# Altium PCB STC12C5A60S2.PcbDoc
Units mil, origin at the board's own origin, x right, y up, seen from the top; angles counter-clockwise.
Board outline 3950.03 x 3947.04 mil, 2 copper layers (Top Layer, Bottom Layer); 107 components, 96 nets, 396 pads, 0 vias.
Unrouted connection lines stored in the file: 234.
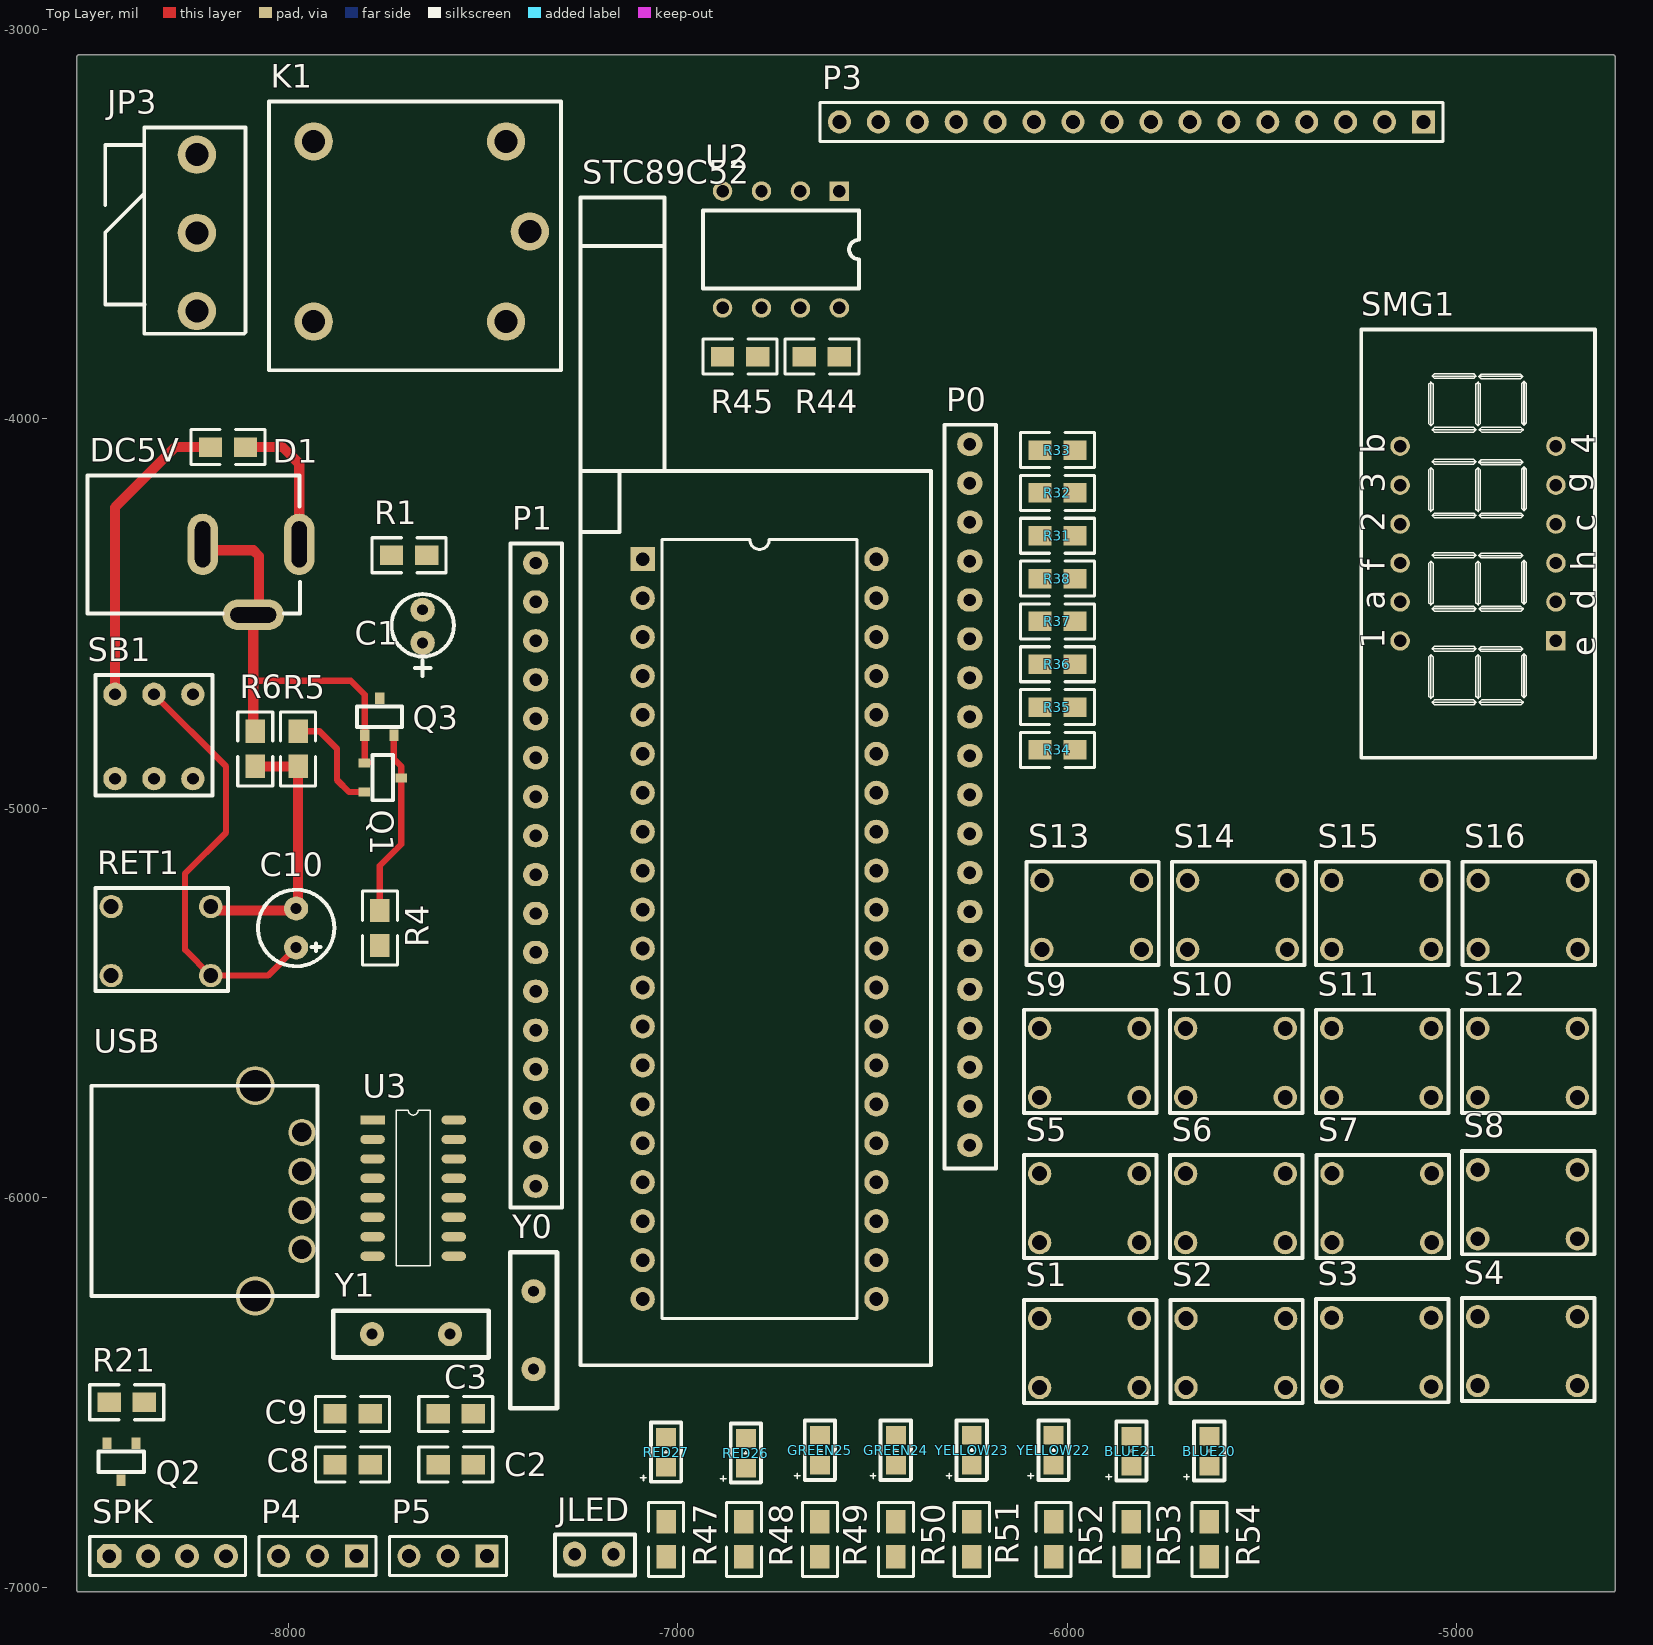
[diagram p0: Top Layer view]
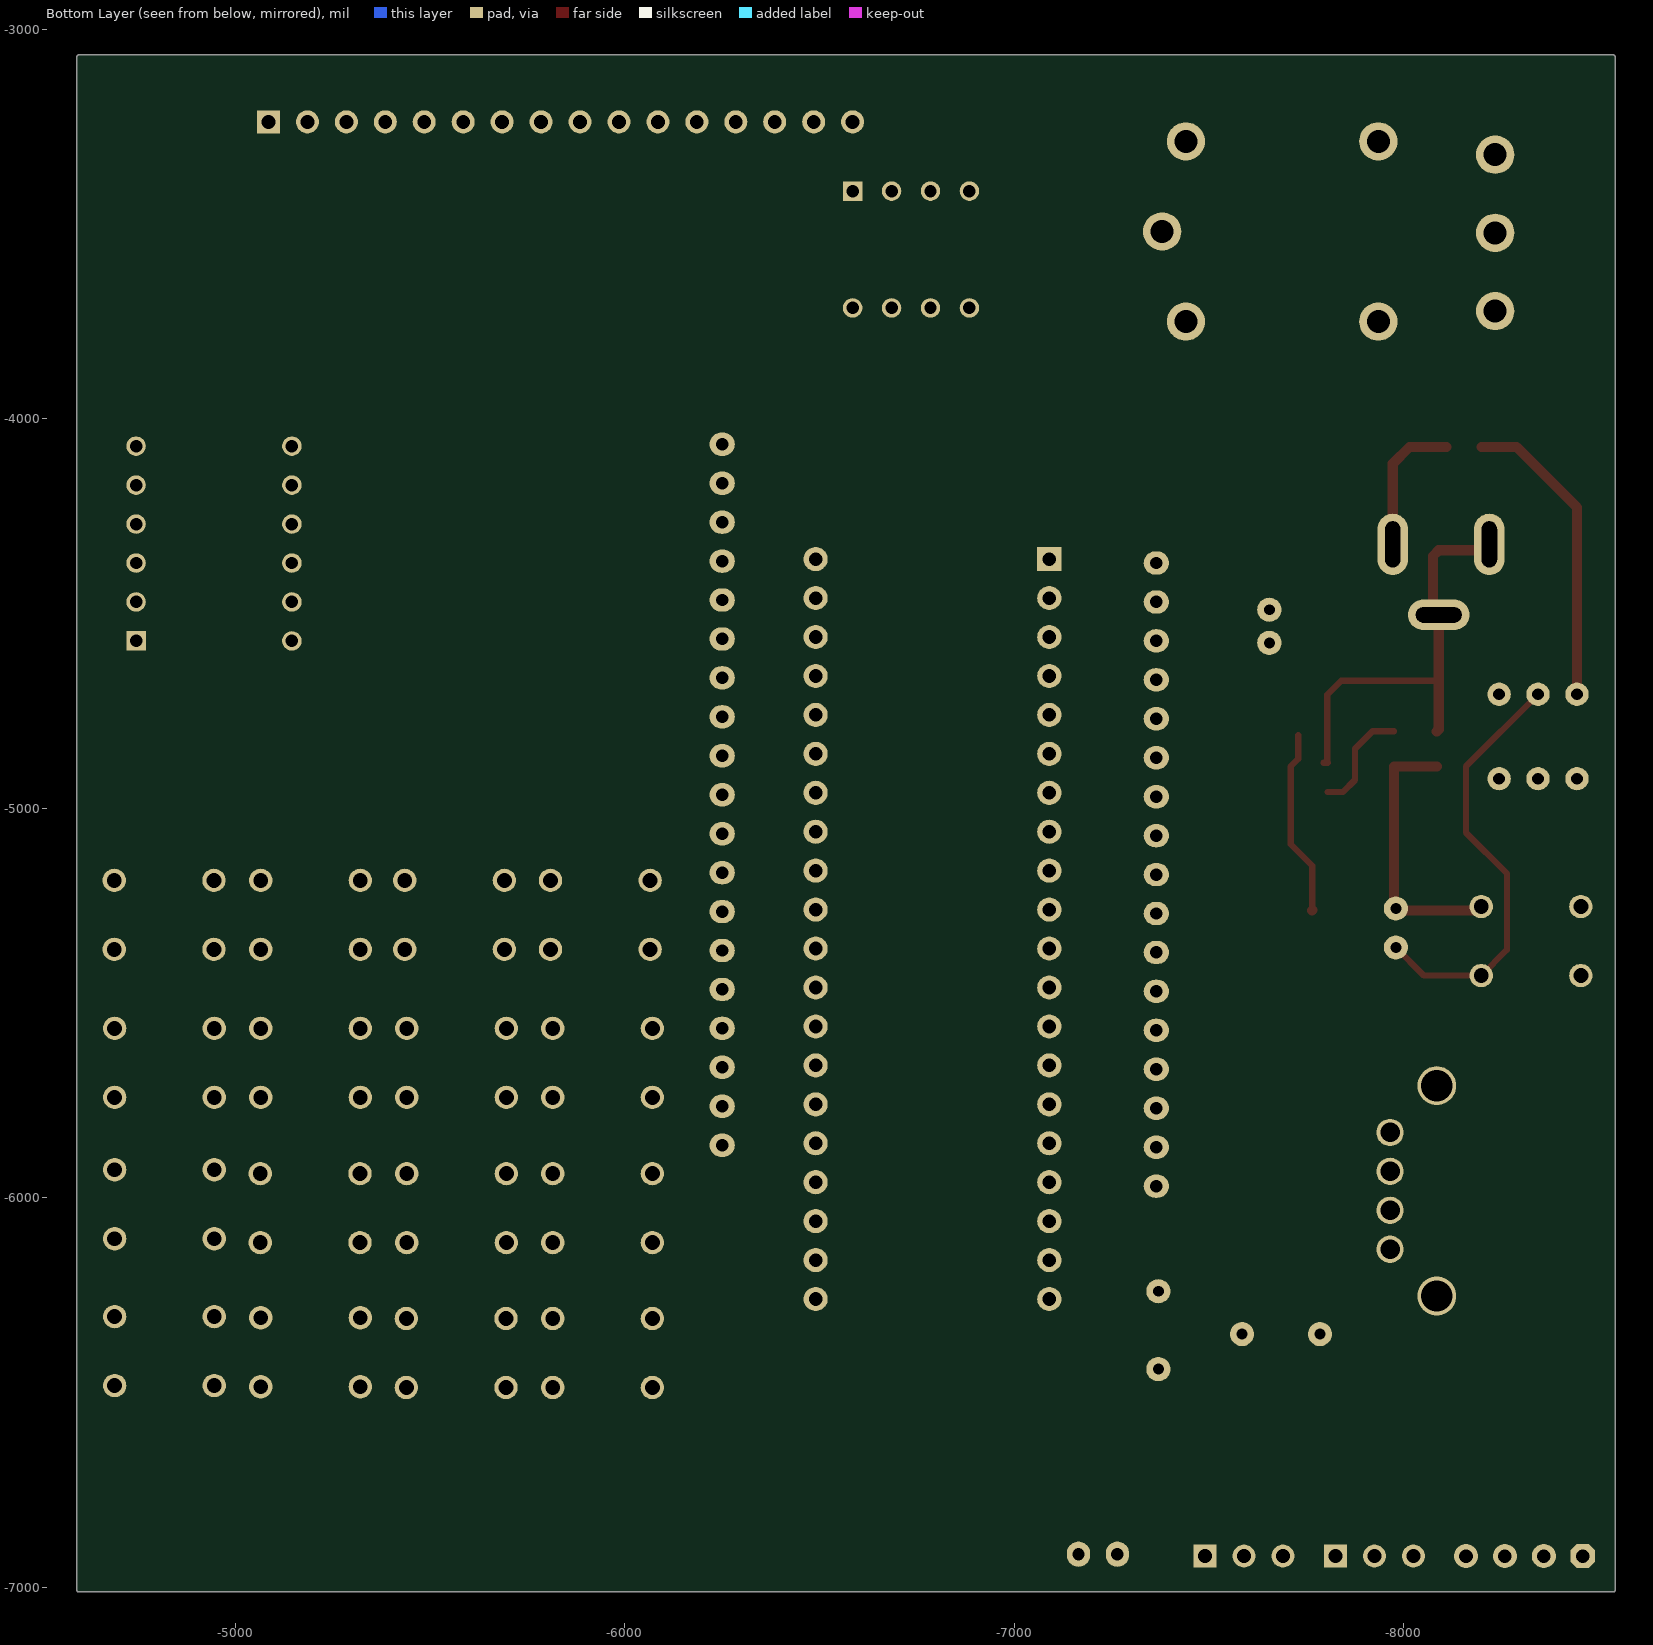
[diagram p1: Bottom Layer view, seen from below]

## Layer stack, top to bottom
Top Solder: solder mask 0.4, Solder Resist, Dk 3.5
Top Layer: signal copper 1.4
Dielectric 1: dielectric 12.6, FR-4, Dk 4.8
Bottom Layer: signal copper 1.4
Bottom Solder: solder mask 0.4, Solder Resist, Dk 3.5

## Board outline
-8543.01,-7007.17 -8543.01,-3070.16 cw(c-8537.99,-3070.16) -8537.99,-3065.14 -4597.99,-3065.14 cw(c-4597.99,-3070.16) -4592.98,-3070.16 -4592.98,-7007.17 cw(c-4597.99,-7007.17) -4597.99,-7012.18 -8535,-7012.18 cw(c-8535,-7007.17) -8536.5,-7011.95 cw(c-8537.99,-7007.17)

## Design rules (kind name [scope] priority, off if disabled: settings)
Clearance [All] p1: gap=10 ignorepadtopadclearanceinfootprint=FALSE except(0: Arc-Hole Track-Hole SMDPad-Hole THPad-Hole Via-Hole Fill-Hole Poly-Hole Region-Hole Text-Hole)
PolygonConnect [All] p1: connectstyle=Relief reliefconductorwidth=10 reliefentries=4 polygonreliefangle="90 Angle" airgapwidth=10
RoutingVias [All] p1: holewidth=28 width=50 viastyle="Through Hole" minholewidth=28 minwidth=50 maxholewidth=28 maxwidth=50
SolderMaskExpansion [All] p1: expansion=4
Width [All] p1: maxlimit=26 minlimit=10 preferedwidth=16
30 further rules are at their usual default settings.

## Components (designator, comment, footprint, x,y, rotation, side; value= is the part's Value field where it differs from the comment)
BLUE20 "LED0" led-0805 -5635,-6689.33 r90 top
BLUE21 "LED0" led-0805 -5835,-6689.33 r90 top
C1 "10u" C2 -7655,-4575 r90 top
C2 "Cap" 0805R -7615,-6685 r0 top value=0.1uF
C3 "Cap" 0805R -7615,-6555 r0 top value=0.1uF
C4 "100uf" c4 -6570,-1002.17 r0 top
C5 "104" 0805R -6745,-1042.17 r90 top
C6 "Cap" 0805R -8835,-332.17 r90 top value=104
C7 "104" 0805R -2440,-4712.17 r90 top
C8 "22P" 0805R -7790,-6685 r180 top
C9 "22p" 0805R -7790,-6555 r180 top
C10 "10uF" c4 -7980,-5357.17 r90 top
D1 "1N5918" 0805R -8110,-4072.17 r180 top
D4 "4148" 0805R -8070,-1042.17 r90 top
D42 "LED0" led-0805 -8310,-967.17 r0 top
DC5V "POWER" DC5V-3 -7971.97,-4322.17 r270 top
GREEN24 "LED0" led-0805 -6440,-6687.17 r90 top
GREEN25 "LED0" led-0805 -6635,-6687.17 r90 top
JLED "JJ" j2 -7265,-6915 r90 top
JP3 "JP3" JP3 -8235,-3321.38 r270 top
JPW "JPW" SIP -6260,-1082.17 r90 top
JSM "JJ" j2 -4855,-242.17 r0 top
K1 "JDQ" JDQ-2 -8042.88,-3870.7 r0 top
P0 "P2" j19 -6250,-4065 r0 top
P1 "Header 17" j17 -7365,-4370 r0 top
P3 "Header 16" HDR1X16 -5085,-3237.17 r180 top
P4 "DS18B20" HDR1X3#1 -7825,-6920 r180 top
P5 "H1838" HDR1X3#1 -7490,-6920 r180 top
P6 "SW/JDQ" HDR1X3#1 -2290,-3202.17 r90 top
P7 "SW/SPK" HDR1X3#1 -3150,-4417.17 r90 top
Q1 "S8050" "SOT-23 S8050" -7784,-4863.17 r270 top
Q2 "S8550" "SOT-23 S8050" -8371,-6651 r180 top
Q3 "8050" "SOT-23 S8050" -7824,-4791.17 r0 top
Q4 "S8550" "SOT-23 S8050" -3070,-3042.17 r0 top
Q5 "S8050" "SOT-23 S8050" -2660,-4662.17 r0 top
Q10 "S8550" "SOT-23 S8050" -6170,-282.17 r0 top
Q11 "S8550" "SOT-23 S8050" -5950,-282.17 r0 top
Q12 "S8550" "SOT-23 S8050" -5750,-282.17 r0 top
Q13 "S8550" "SOT-23 S8050" -5530,-282.17 r0 top
R1 "10K" 0805R -7735,-4350 r0 top
R2 "1K" 0805R -3810,-3752.17 r90 top
R4 "1K" 0805R -7765,-5262.17 r270 top
R5 "1K" 0805R -7975,-4892.17 r90 top
R6 "10K" 0805R -8085,-4892.17 r90 top
R7 "Res1" 0805R -4005,-6447.17 r90 top value=10K
R8 "Res1" 0805R -4175,-6447.17 r90 top value=10K
R9 "Res1" 0805R -2290,-3872.17 r90 top value=10K
R10 "5.1K" 0805R -9545,-1042.17 r90 top
R11 "5.1K" 0805R -9325,-1042.17 r90 top
R12 "5.1K" 0805R -9125,-1042.17 r90 top
R13 "5.1K" 0805R -8905,-1042.17 r90 top
R21 "5.1K" 0805R -8370,-6525 r180 top
R31 "1K" 0805R -6070,-4300 r0 top
R32 "1K" 0805R -6070,-4190 r0 top
R33 "1K" 0805R -6070,-4080 r0 top
R34 "1K" 0805R -6070,-4850 r0 top
R35 "1K" 0805R -6070,-4740 r0 top
R36 "1K" 0805R -6070,-4630 r0 top
R37 "1K" 0805R -6070,-4520 r0 top
R38 "1K" 0805R -6070,-4410 r0 top
R41 "5.1K" 0805R -2845,-3092.17 r90 top
R42 "1K" 0805R -4120,-3092.17 r90 top
R43 "5.1k" 0805R -8490,-332.17 r90 top
R44 "5.1K" 0805R -6675,-3840 r0 top
R45 "5.1K" 0805R -6885,-3840 r0 top
R46 "100" 0805R -3890,-3092.17 r90 top
R47 "102" 0805R -7030,-6922.17 r90 top
R48 "102" 0805R -6830,-6922.17 r90 top
R49 "103" 0805R -6635,-6922.17 r90 top
R50 "103" 0805R -6440,-6922.17 r90 top
R51 "102" 0805R -6245,-6922.17 r90 top
R52 "102" 0805R -6035,-6922.17 r90 top
R53 "472" 0805R -5835,-6922.17 r90 top
R54 "472" 0805R -5635,-6922.17 r90 top (schematic designator 54)
red "LED0" led-0805 -3260,-3017.17 r0 top
RED26 "LED0" led-0805 -6825,-6694.33 r90 top
RED27 "LED0" led-0805 -7030,-6692.17 r90 top
RET1 "RET" SW-5.4 -8455,-5429.33 r0 top
RW1 "Res Tap" RW -7945,-907.17 r0 top value=10K
S1 "RET" SW-5.4 -6070.9,-6487.17 r0 top
S2 "RET" SW-5.4 -5695,-6487.17 r0 top
S3 "RET" SW-5.4 -5320.9,-6485 r0 top
S4 "RET" SW-5.4 -4945.9,-6482.17 r0 top
S5 "RET" SW-5.4 -6070.9,-6115 r0 top
S6 "RET" SW-5.4 -5695.9,-6115 r0 top
S7 "SW-PB" SW-5.4 -5320,-6115 r0 top
S8 "SW-PB" SW-5.4 -4945.9,-6105 r0 top
S9 "SW-PB" SW-5.4 -6070.9,-5742.17 r0 top
S10 "SW-PB" SW-5.4 -5695.9,-5742.17 r0 top
S11 "SW-PB" SW-5.4 -5320.9,-5742.17 r0 top
S12 "SW-PB" SW-5.4 -4945.9,-5742.17 r0 top
S13 "SW-PB" SW-5.4 -6065,-5362.17 r0 top
S14 "SW-PB" SW-5.4 -5690.9,-5362.17 r0 top
S15 "SW-PB" SW-5.4 -5320.9,-5362.17 r0 top
S16 "SW-PB" SW-5.4 -4945,-5362.17 r0 top
SB1 "RET" SW6 -8445,-4707.17 r0 top
SMG1 "SMG" smg -4975,-4335 r90 top
SPK "Speaker" HDR1X4 -8460,-6920 r0 top
STC89C52 "U1" Stc89c52 -7090,-4360 r0 top
U1 "3144E" HDR1X3#2 -9770,-2032.17 r90 top
U2 "24C04" DIP8 -6585,-3415 r270 top
U3 "CH340G-16" "SOP-16 - duplicate" -7783.66,-5800 r0 top
USB "CON4" USB -7965,-5832.17 r90 top
Y0 "11.0592" XTAL1 -7370,-6440 r90 top
Y1 "12MHz" XTAL1 -7585,-6350 r180 top
YELLOW22 "LED0" led-0805 -6035,-6687.17 r90 top
YELLOW23 "LED0" led-0805 -6245,-6687.17 r90 top

## Footprints (in the part's own frame and the unit in brackets; to place one, negate y for a bottom-side part, rotate by r counter-clockwise, add the part's x,y. Pads: shape width x height; smd on the part's side, far side on the other; paste and mask are expansions set on the pad)
0805R [mil]
  rect 60x50 smd: 1(0,0) 2(90,0)
  silkscreen extent -50,-45 140,45
C2 [mil]
  round 62 hole 28: 1(0,0) 2(85,0)
  silkscreen extent -85,-80 125,80
c4 [mil]
  round 62 hole 28: 1(0,0) 2(100,0)
  silkscreen extent -48,-98 148,98
DC5V-3 [mm]
  oval 4x2 hole 1 slot 3 at 0 deg: 1(0,0) 2(0,-6.3)
  oval 2x4 hole 1 slot 3 at 90 deg: 3(4.6,-3)
  silkscreen extent -4.5,-13.8 4.5,0.04
DIP8 [mil]
  rect 50x50 hole 32: 1(0,0)
  round 50 hole 32: 2(0,-100) 3(0,-200) 4(0,-300) 5(300,-300) 6(300,-200) 7(300,-100) 8(300,0)
  silkscreen extent 50,-350 250,50
HDR1X3#1 [mm] "Connector; Header; 3 Position"
  rect 1.5x1.5 hole 0.9: 1(0,0)
  round 1.5 hole 0.9: 2(2.54,0) 3(5.08,0)
  silkscreen extent -1.27,-1.27 6.35,1.27
HDR1X3#2 [mm]
  oct 1.575x1.575 hole 0.889: 1(0,0)
  round 1.575 hole 0.889: 2(2.54,0) 3(5.08,0)
  silkscreen extent -1.27,-1.27 6.35,1.27
HDR1X4 [mil]
  oct 62x62 hole 35: 1(0,0)
  round 62 hole 35: 2(100,0) 3(200,0) 4(300,0)
  silkscreen extent -50,-50 350,50
HDR1X16 [mm] "Connector; Header; 16 Position"
  rect 1.5x1.5 hole 0.9: 1(0,0)
  round 1.5 hole 0.9: 2(2.54,0) 3(5.08,0) 4(7.62,0) 5(10.16,0) 6(12.7,0) 7(15.24,0) 8(17.78,0) 9(20.32,0) 10(22.86,0) 11(25.4,0) 12(27.94,0) 13(30.48,0) 14(33.02,0) 15(35.56,0) 16(38.1,0)
  silkscreen extent -1.27,-1.27 39.37,1.27
j2 [mil]
  oval 65x60 hole 32: 1(0,0) 2(0,-100)
  silkscreen extent -55,-155 50,50
j17 [mil]
  oval 65x60 hole 32: 1(0,0) 2(0,-100) 3(0,-200) 4(0,-300) 5(0,-400) 6(0,-500) 7(0,-600) 8(0,-700) 9(0,-800) 10(0,-900) 11(0,-1000) 12(0,-1100) 13(0,-1200) 14(0,-1300) 15(0,-1400) 16(0,-1500) 17(0,-1600)
  silkscreen extent -65,-1655 68,50
j19 [mil]
  oval 65x60 hole 32: 1(0,0) 2(0,-100) 3(0,-200) 4(0,-300) 5(0,-400) 6(0,-500) 7(0,-600) 8(0,-700) 9(0,-800) 10(0,-900) 11(0,-1000) 12(0,-1100) 13(0,-1200) 14(0,-1300) 15(0,-1400) 16(0,-1500) 17(0,-1600) 18(0,-1700) 19(0,-1800)
  silkscreen extent -65,-1860 68,50
JDQ-2 [mm]
  round 2.5 hole 1.5: 1(2.74,3.066) 2(2.74,14.816) 3(15.29,14.816) 4(16.84,8.941) 5(15.29,3.066)
  silkscreen extent -0.18,-0.11 18.87,17.42
JP3 [mm]
  round 2.5 hole 1.5: 1(0,0) 2(5.1,0) 3(10.2,0)
  silkscreen extent -1.78,-5.97 11.68,3.18
led-0805 [mm]
  rect 1.2x1.3 smd: 1(0,0) 2(1.96,0)
  silkscreen extent -0.94,-0.99 2.92,1.68
RW [mm]
  round 1.8 hole 1.1: 1(3.65,-0.762) 2(1.143,-5.75) 3(6.096,-5.75)
  silkscreen extent 0,-6.5 7.3,0
SIP [mil]
  round 50 hole 32: 1(-75,50) 2(25,50) 3(125,50) 4(-75,-50) 5(25,-50) 6(125,-50)
  silkscreen extent -125,-100 175,100
smg [mil]
  rect 50x50 hole 32: 1(-235,-230)
  round 50 hole 32: 2(-135,-230) 3(-35,-230) 4(65,-230) 5(165,-230) 6(265,-230) 7(265,170) 8(165,170) 9(65,170) 10(-35,170) 11(-135,170) 12(-235,170)
  silkscreen extent -535,-330 565,270
"SOP-16 - duplicate" [mm]
  rect 1.6x0.6 smd: 1(0,0)
  oval 1.6x0.6 smd: 2(0,-1.27) 3(0,-2.54) 4(0,-3.81) 5(0,-5.08) 6(0,-6.35) 7(0,-7.62) 8(0,-8.89) 9(5.3,-8.89) 10(5.3,-7.62) 11(5.3,-6.35) 12(5.3,-5.08) 13(5.3,-3.81) 14(5.3,-2.54) 15(5.3,-1.27) 16(5.3,0)
  silkscreen extent 1.53,-9.53 3.77,0.64
"SOT-23 S8050" [mil]
  rect 23.62x29.53 smd: 1(20,-21) 2(95,-21) 3(59,74)
  silkscreen extent 0,0 116,53
Stc89c52 [mil]
  rect 62x62 hole 35: 1(0,0)
  round 62 hole 35: 2(0,-100) 3(0,-200) 4(0,-300) 5(0,-400) 6(0,-500) 7(0,-600) 8(0,-700) 9(0,-800) 10(0,-900) 11(0,-1000) 12(0,-1100) 13(0,-1200) 14(0,-1300) 15(0,-1400) 16(0,-1500) 17(0,-1600) 18(0,-1700) 19(0,-1800) 20(0,-1900) 21(600,-1900) 22(600,-1800) 23(600,-1700) 24(600,-1600) 25(600,-1500) 26(600,-1400) 27(600,-1300) 28(600,-1200) 29(600,-1100) 30(600,-1000) 31(600,-900) 32(600,-800) 33(600,-700) 34(600,-600) 35(600,-500) 36(600,-400) 37(600,-300) 38(600,-200) 39(600,-100) 40(600,0)
  silkscreen extent -160,-2070 740,929
SW6 [mil]
  round 60 hole 30: 1(0,0) 2(100,0) 3(200,0) 4(200,-216.54) 5(100,-216.54) 6(0,-216.54)
  silkscreen extent -50,-260 250,50
SW-5.4 [mil]
  round 60 hole 38: 1(255.91,177.17) 2(255.91,0) 3(0,0) 4(0,177.17)
  silkscreen extent -40,-40 300,225
USB [mil]
  round 70 hole 50: 1(0,0) 2(-100,0) 3(-200,0) 4(-300,0)
  round 100 hole 80: ""(-420,120) ""(120,120)
  silkscreen extent -420,-40 120,540
XTAL1 [mil]
  round 62 hole 28: 1(0,0) 2(200,0)
  silkscreen extent -100,-60 300,60

## Part data
BLUE20 BLUE21 D42 GREEN24 GREEN25 red RED26 RED27 YELLOW22 YELLOW23: "Typical INFRARED GaAs LED", LatestRevisionDate=08-Jul-2005, LatestRevisionNote="Mech Layer 1 removed.", PackageReference=LED-0, Published=8-Jun-2000, Publisher="Altium Limited"
C1 C4 C10: library part "CAPACITOR POL", "Capacitor"
C2 C3: "Capacitor", Manufacturer="Generic Components", Class=Passive, Published=08/06/2000, Publisher="Altium Hobart Technology Centre", SubClass=Capacitor
C5: library part CAP, "Capacitor"
C6: "Capacitor", LatestRevisionDate=17-Jul-2002, LatestRevisionNote="Re-released for DXP Platform.", PackageReference=RAD-0.3, Published=8-Jun-2000, Publisher="Altium Limited"
C7 C8 C9: library part Cap, "Capacitor"
D1: library part "Diode 1N5408", "3 Amp Medium Power Silicon Rectifier Diode", ComponentLink1Description="Manufacturer Link", ComponentLink1URL=http://www.irf.com/, DatasheetDocument=Aug-1984, LatestRevisionDate=17-Jul-2002, LatestRevisionNote="Re-released for DXP Platform.", PackageReference=DO-201AD, Published=8-Jun-2000, Publisher="Altium Limited"
D4: library part "Diode 1N4001", "1 Amp General Purpose Rectifier", PackageDocument=Aug-1999, Code_JEDEC=DO-204-AL, ComponentLink1Description="Manufacturer Link", ComponentLink1URL=http://www.fairchildsemi.com/, ComponentLink2Description=Datasheet, ComponentLink2URL=http://www.fairchildsemi.com/ds/1N%2F1N4001.pdf, DatasheetDocument=1998, LatestRevisionDate=17-Jul-2002, LatestRevisionNote="Re-released for DXP Platform.", PackageReference=DO-41, Published=8-Jun-2000, Publisher="Altium Limited"
DC5V P4 P5 P6 P7: library part "Header 3", "Header, 3-Pin", LatestRevisionDate=17-Jul-2002, LatestRevisionNote="Re-released for DXP Platform.", Publisher="Altium Limited"
P0: library part "Header 19", "Header, 19-Pin", LatestRevisionDate=17-Jul-2002, LatestRevisionNote="Re-released for DXP Platform.", Publisher="Altium Limited"
P1: "Header, 17-Pin", LatestRevisionDate=17-Jul-2002, LatestRevisionNote="Re-released for DXP Platform.", Publisher="Altium Limited"
P3: "Header, 16-Pin", LatestRevisionDate=17-Jul-2002, LatestRevisionNote="Re-released for DXP Platform.", Publisher="Altium Limited"
Q1 Q3 Q5: library part 2N3904, "NPN General Purpose Amplifier", ComponentLink1Description="Manufacturer Link", ComponentLink1URL=http://www.fairchildsemi.com/, ComponentLink2Description=Datasheet, ComponentLink2URL=http://www.fairchildsemi.com/ds/2N%2F2N3904.pdf, DatasheetVersion=1997, LatestRevisionDate=15-Jan-2003, LatestRevisionNote="PCB Footprint 'BCY-W3/D4.7' replaced", PackageDescription="TO, Flat Index; 3 In-Line, Axial Leads; Body Dia. 4.5mm; Leads 0.51 x 0.48 mm (max)", PackageReference=TO-92A, PackageVersion=Sep-1998, Published=8-Jun-2000, Publisher="Altium Limited"
Q2 Q4 Q10 Q11 Q12 Q13: library part 2N3906, "PNP General Purpose Amplifier", PackageDocument=Sep-1998, Code_JEDEC=TO-92A, ComponentLink1Description="Manufacturer Link", ComponentLink1URL=http://www.fairchildsemi.com/, ComponentLink2Description=Datasheet, ComponentLink2URL=http://www.fairchildsemi.com/ds/2N%2F2N3906.pdf, DatasheetDocument=1997, LatestRevisionDate=15-Jan-2003, LatestRevisionNote="PCB Footprint 'BCY-W3/D4.7' replaced", PackageReference=TO-92A, Published=8-Jun-2000, Publisher="Altium Limited"
R1 R4 R5 R6 R10 R11 R12 R13 R21 R31 R32 R33 R34 R35 R36 R37 R38 R41 R42 R43 R46: library part Res2
R2 R47 R48 R49 R50 R51 R52 R53 R54: library part RES2
R7 R8 R9: "Resistor", LatestRevisionDate=17-Jul-2002, LatestRevisionNote="Re-released for DXP Platform.", PackageDescription="Axial Device, Thru-Hole; 2 Leads; 0.3 in Pin Spacing", PackageReference=AXIAL-0.3, Published=8-Jun-2000, Publisher="Altium Limited"
R44 R45: library part Res2, "Resistor", LatestRevisionDate=17-Jul-2002, LatestRevisionNote="Re-released for DXP Platform.", PackageReference=AXIAL-0.4, Published=8-Jun-2000, Publisher="Altium Limited"
RET1 S1 S2 S3 S4 S5 S6 SB1: library part SW-PB
RW1: "Tapped Resistor", LatestRevisionDate=17-Jul-2002, LatestRevisionNote="Re-released for DXP Platform.", PackageReference=VR3, Published=24-Mar-1999, Publisher="Altium Limited", Set Position=0.5, Sim Note="Enter the Resistance value and the set point into parameter fields."
S7 S8 S9 S10 S11 S12 S13 S14 S15 S16: "Switch", LatestRevisionDate=17-Jul-2002, LatestRevisionNote="Re-released for DXP Platform.", PackageReference=SPST-2, Published=24-Mar-1999, Publisher="Altium Limited"
STC89C52: library part 89C51
U1: "开关式霍尔传感器"
USB: "Connector"
Y0: library part CRYSTAL, "Crystal"
Y1: library part XTAL, "Crystal Oscillator", LatestRevisionDate=17-Jul-2002, LatestRevisionNote="Re-released for DXP Platform.", PackageReference=R38, Published=8-Jun-2000, Publisher="Altium Limited"

## Nets (pads, with @x,y where several pads share a name; then routed paths per layer and width w, separated by ;. In a path a pad name is that pad's centre, name@x,y a point inside that pad or via, vN(x,y) a via of type N, cw(c..) or ccw(c..) an arc to the next point about the centre after c; other vN are vias at no path point)
3V3: C7.1 U3.4
5V: R7.2 R9.2 U1.1
ALE: P0.10 STC89C52.30
DGND: C2.1 C3.1 C6.1 D4.1 D42.2 JPW.1 JPW.2 JPW.3 K1.5 P3.1 P3.16 P4.1 P5.2 Q3.3 R1.1 R2.1 RW1.1 SPK.2 STC89C52.20 U2.1 U2.2 U2.3 U2.4 U2.7
G: Q5.1 U1.2
GND: C4.2 C5.2 C7.2 C8.2 C9.2 DC5V.2 DC5V.3 Q1.1 Q3.1 R6.2 U3.1 USB.4 | length 1077.8
  Top Layer w16: -8090.08,-4677.17 -8085.08,-4672.17 -7840,-4672.17 -7804,-4708.17 Q3.1 -7804,-4882.17 Q1.1 Q1.1@-7794,-4883.17
  Top Layer w26: DC5V.2@-8205,-4337.17 -8090,-4337.17 -8075.08,-4352.09 DC5V.3@-8075.08,-4503.27 ; DC5V.3 -8090.08,-4677.17 -8090.08,-4797.09 R6.2
"Hall sensor": P6.3
JDQ: P6.1 R41.1
Net54_1: JLED.2 R47.1 R48.1 R49.1 R50.1 R51.1 R52.1 R53.1 R54.1
Net54_2: BLUE20.1 R54.2
NetBLUE21_1: BLUE21.1 R53.2
NetC2_2: C2.2 STC89C52.19 Y0.1
NetC3_2: C3.2 STC89C52.18 Y0.2
NetC8_1: C8.1 U3.7 Y1.1
NetC9_1: C9.1 U3.8 Y1.2
NetC10_2: C10.2 R5.1 R6.1 RET1.1 | length 685.3
  Top Layer w26: RET1.1 -8189.09,-5262.17 C10.2@-8000,-5262.17 ; R6.1 R5.1 -7975,-5257.17 C10.2@-7980,-5262.17
NetD1_1: D1.1 DC5V.1 | length 362.8
  Top Layer w26: D1.1 -8015,-4072.17 -7971.97,-4115.2 DC5V.1
NetD4_2: D4.2 K1.3 Q4.3 R42.2
NetD42_1: D42.1 R42.1
NetGREEN24_1: GREEN24.1 R50.2
NetGREEN25_1: GREEN25.1 R49.2
NetJP3_1: JP3.1 K1.2
NetJP3_2: JP3.2 K1.4
NetJP3_3: JP3.3 K1.1
NetJSM_2: JSM.2 Q10.1 Q11.1 Q12.1 Q13.1
NetP3_3: P3.3 RW1.3
NetQ1_2: Q1.2 R5.2 | length 281.5
  Top Layer w16: R5.2 -7920,-4802.17 -7875,-4847.17 -7875,-4927.17 -7844,-4958.17 Q1.2
NetQ1_3: Q1.3 Q3.2 R4.1 | length 481.5
  Top Layer w16: R4.1@-7766,-5261.17 -7765,-5260.17 -7765,-5147.17 -7710,-5092.17 Q1.3 -7710,-4892.17 -7729,-4873.17 Q3.2
  Top Layer w26: R4.1@-7766,-5261.17 R4.1
NetQ2_2: Q2.2 R21.2
NetQ2_3: Q2.3 SPK.1
NetQ4_2: Q4.2 R41.2
NetQ5_2: Q5.2 R8.1
NetQ5_3: Q5.3 R9.1
NetQ10_2: Q10.2 R10.1
NetQ10_3: Q10.3 SMG1.12
NetQ11_2: Q11.2 R11.1
NetQ11_3: Q11.3 SMG1.9
NetQ12_2: Q12.2 R12.1
NetQ12_3: Q12.3 SMG1.8
NetQ13_2: Q13.2 R13.1
NetQ13_3: Q13.3 SMG1.6
NetR2_2: R2.2 red.2
NetR7_1: R7.1 R8.2 U1.3
NetR31_2: R31.2 SMG1.11
NetR32_2: R32.2 SMG1.7
NetR33_2: R33.2 SMG1.4
NetR34_2: R34.2 SMG1.2
NetR35_2: R35.2 SMG1.1
NetR36_2: R36.2 SMG1.10
NetR37_2: R37.2 SMG1.5
NetR38_2: R38.2 SMG1.3
NetR46_2: R46.2 RW1.2
NetR47_2: R47.2 RED27.1
NetR48_2: R48.2 RED26.1
NetR51_2: R51.2 YELLOW23.1
NetR52_2: R52.2 YELLOW22.1
NetU3_5: U3.5 USB.3
NetU3_6: U3.6 USB.2
P00: P0.1 P3.7 R31.1 STC89C52.39
P01: P0.2 P3.8 R32.1 STC89C52.38
P02: P0.3 P3.9 R33.1 STC89C52.37
P03: P0.4 P3.10 R34.1 STC89C52.36
P04: P0.5 P3.11 R35.1 STC89C52.35
P05: P0.6 P3.12 R36.1 STC89C52.34
P06: P0.7 P3.13 R37.1 STC89C52.33
P07: P0.8 P3.14 R38.1 STC89C52.32
P10: P1.1 P3.4 R10.2 STC89C52.1
P11: P1.2 P3.5 R11.2 STC89C52.2
P12: P1.3 P3.6 R12.2 STC89C52.3
P13: P1.4 R13.2 STC89C52.4
P14: P1.5 P6.2 STC89C52.5
P15: P1.6 STC89C52.6
P16: P1.7 R44.1 STC89C52.7 U2.6
P17: P1.8 R45.1 STC89C52.8 U2.5
P20: BLUE20.2 P0.19 STC89C52.21
P21: BLUE21.2 P0.18 STC89C52.22
P22: P0.17 STC89C52.23 YELLOW22.2
P23: P0.16 STC89C52.24 YELLOW23.2
P24: GREEN24.2 P0.15 STC89C52.25
P25: GREEN25.2 P0.14 STC89C52.26
P26: P0.13 RED26.2 STC89C52.27
P27: P0.12 RED27.2 STC89C52.28
P30: P1.10 S1.1 S2.1 S3.1 S4.1 STC89C52.10 U3.2
P31: P1.11 S5.1 S6.1 S7.1 S8.1 STC89C52.11 U3.3
P32: P1.12 P4.2 R43.1 S9.1 S10.1 S11.1 S12.1 STC89C52.12
P33: P1.13 P5.1 S13.1 S14.1 S15.1 S16.1 STC89C52.13
P34: P1.14 S1.2 S5.2 S9.2 S13.2 STC89C52.14
P35: P1.15 S2.2 S6.2 S10.2 S14.2 STC89C52.15
P36: P1.16 S3.2 S7.2 S11.2 S15.2 STC89C52.16
P37: P1.17 S4.2 S8.2 S12.2 S16.2 STC89C52.17
PEA: P0.9 STC89C52.31
PSEN: P0.11 STC89C52.29
RST: C1.2 P1.9 R1.2 STC89C52.9
SPK: R21.1
VCC: C1.1 C4.1 C5.1 C6.2 C10.1 JLED.1 JPW.4 JPW.5 JPW.6 JSM.1 P3.2 P3.15 P4.3 P5.3 Q2.1 Q4.1 R4.2 R43.2 R44.2 R45.2 R46.1 red.1 RET1.2 SB1.2 STC89C52.40 U2.8 U3.16 | length 1118.6
  Top Layer w16: SB1.2 -8160,-4892.17 -8160,-5062.17 -8265,-5167.17 -8265,-5363.43 RET1.2 -8052.17,-5429.33 C10.1
VSUB: D1.2 SB1.1 USB.1 | length 789.2
  Top Layer w26: SB1.1 -8445,-4227.17 -8290,-4072.17 D1.2
pads on no net: P7.1 P7.2 P7.3 RET1.3 RET1.4 S1.3 S1.4 S2.3 S2.4 S3.3 S3.4 S4.3 S4.4 S5.3 S5.4 S6.3 S6.4 S7.3 S7.4 S8.3 S8.4 S9.3 S9.4 S10.3 S10.4 S11.3 S11.4 S12.3 S12.4 S13.3 S13.4 S14.3 S14.4 S15.3 S15.4 S16.3 S16.4 SB1.3 SB1.4 SB1.5 SB1.6 SPK.3 SPK.4 U3.9 U3.10 U3.11 U3.12 U3.13 U3.14 U3.15 USB.
copper on no net: | length 63.5
  Top Layer w10: -8095,-4802.17 -8085,-4792.17 ; -8095,-4538.19 -8075.08,-4518.27
  Bottom Layer w10: -8075.08,-4518.27 -8053.9,-4518.27

## Silkscreen, mask and mechanical layers (free items; w line width, h text height)
Mechanical 1:
  lines w10: -8537.99,-7007.17 -8537.99,-3070.16 -4597.99,-3070.16 -4597.99,-7007.17 -8535,-7007.17

## Text inside footprints (layer, text, board x,y; h text height)
SMG1: Top Overlay "e" at -4645,-4610 h60 r90; Top Overlay "d" at -4645,-4490 h60 r90; Top Overlay "h" at -4645,-4390 h60 r90; Top Overlay "c" at -4645,-4290 h60 r90; Top Overlay "g" at -4665,-4190 h60 r90; Top Overlay "4" at -4645,-4090 h60 r90; Top Overlay "b" at -5185,-4090 h60 r90; Top Overlay "3" at -5185,-4190 h60 r90; Top Overlay "2" at -5185,-4290 h60 r90; Top Overlay "f" at -5185,-4390 h60 r90; Top Overlay "a" at -5185,-4490 h60 r90; Top Overlay "1" at -5185,-4590 h60 r90